# Altium PCB RX_fp.PcbDoc
Units mm, origin at the board's own origin, x right, y up, seen from the top; angles counter-clockwise.
Board outline 38.1 x 60.07 mm, 2 copper layers (Top Layer, Bottom Layer); 114 components, 87 nets, 353 pads, 113 vias.
Unrouted connection lines stored in the file: 43.
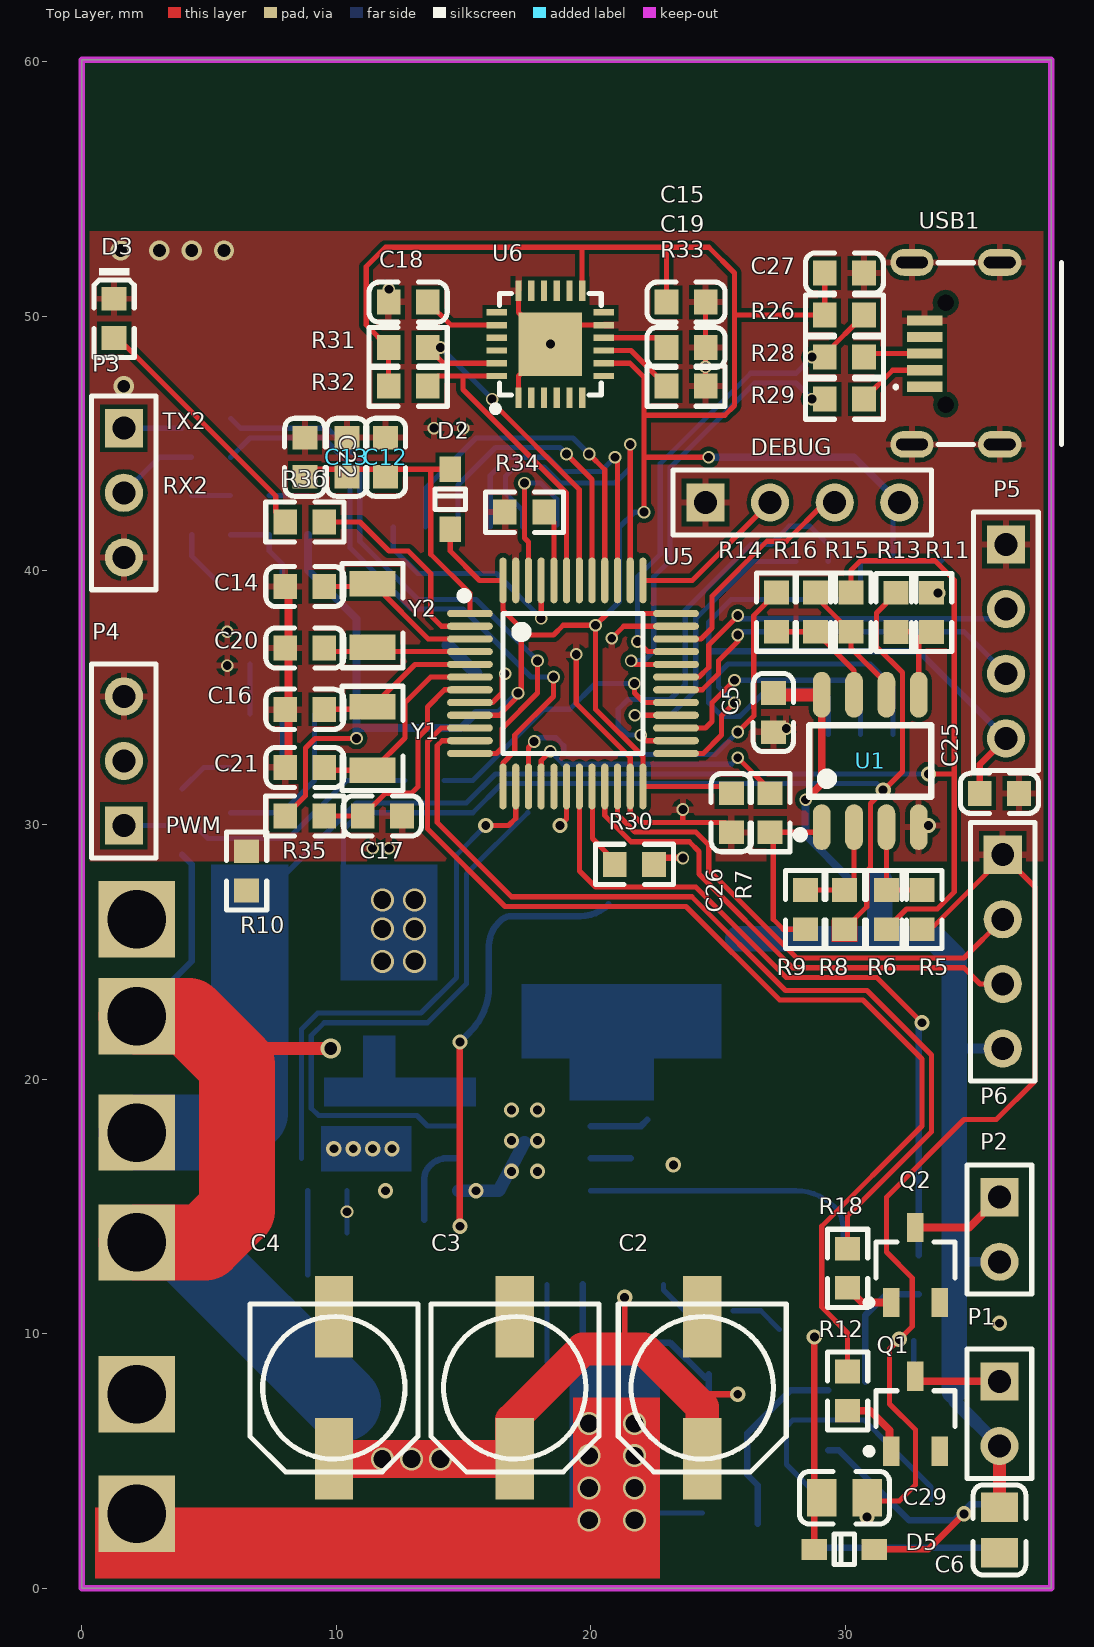
[diagram p0: Top Layer view]
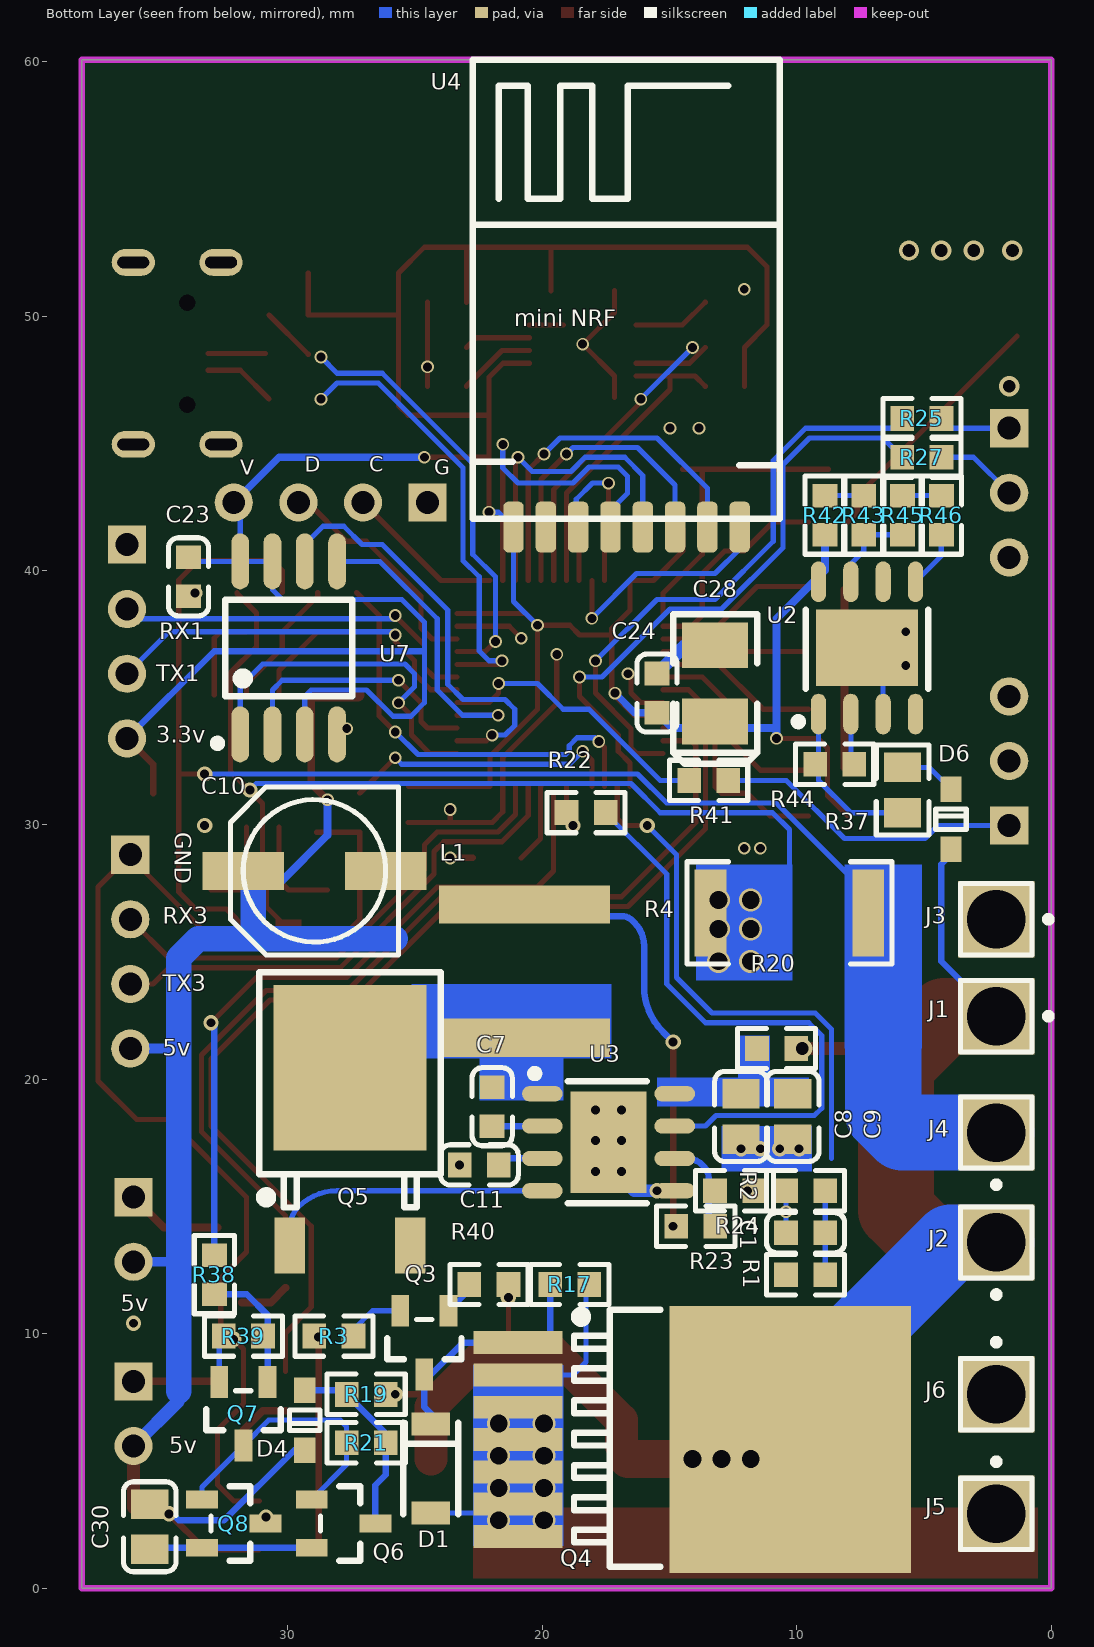
[diagram p1: Bottom Layer view, seen from below]
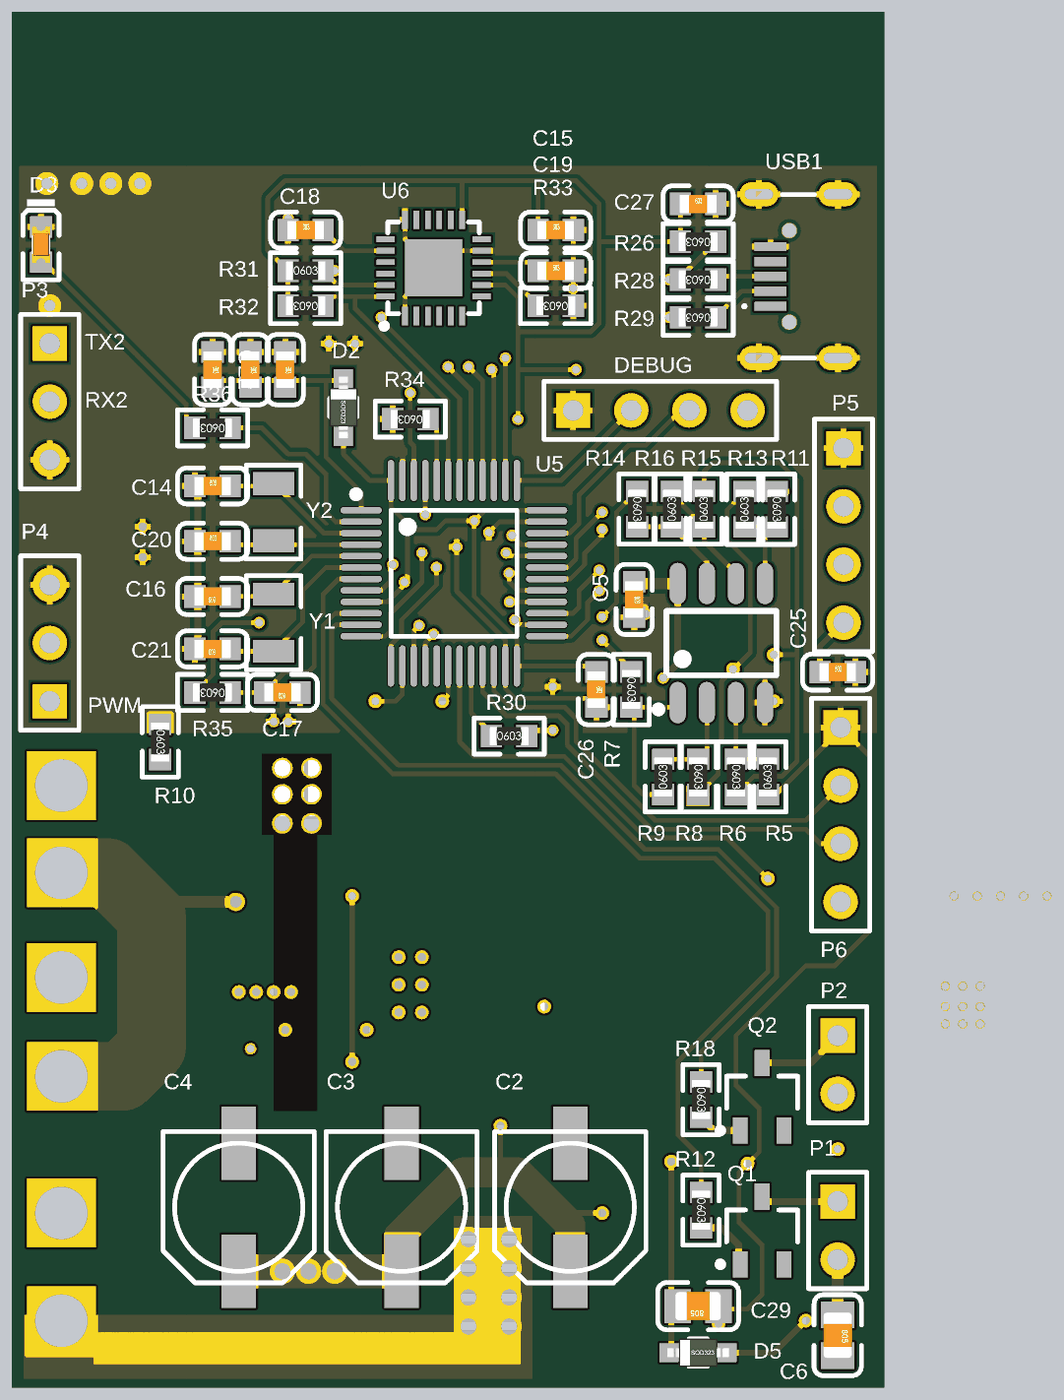
[diagram p2: 3D render of the assembled board from above, using the file's embedded part models]
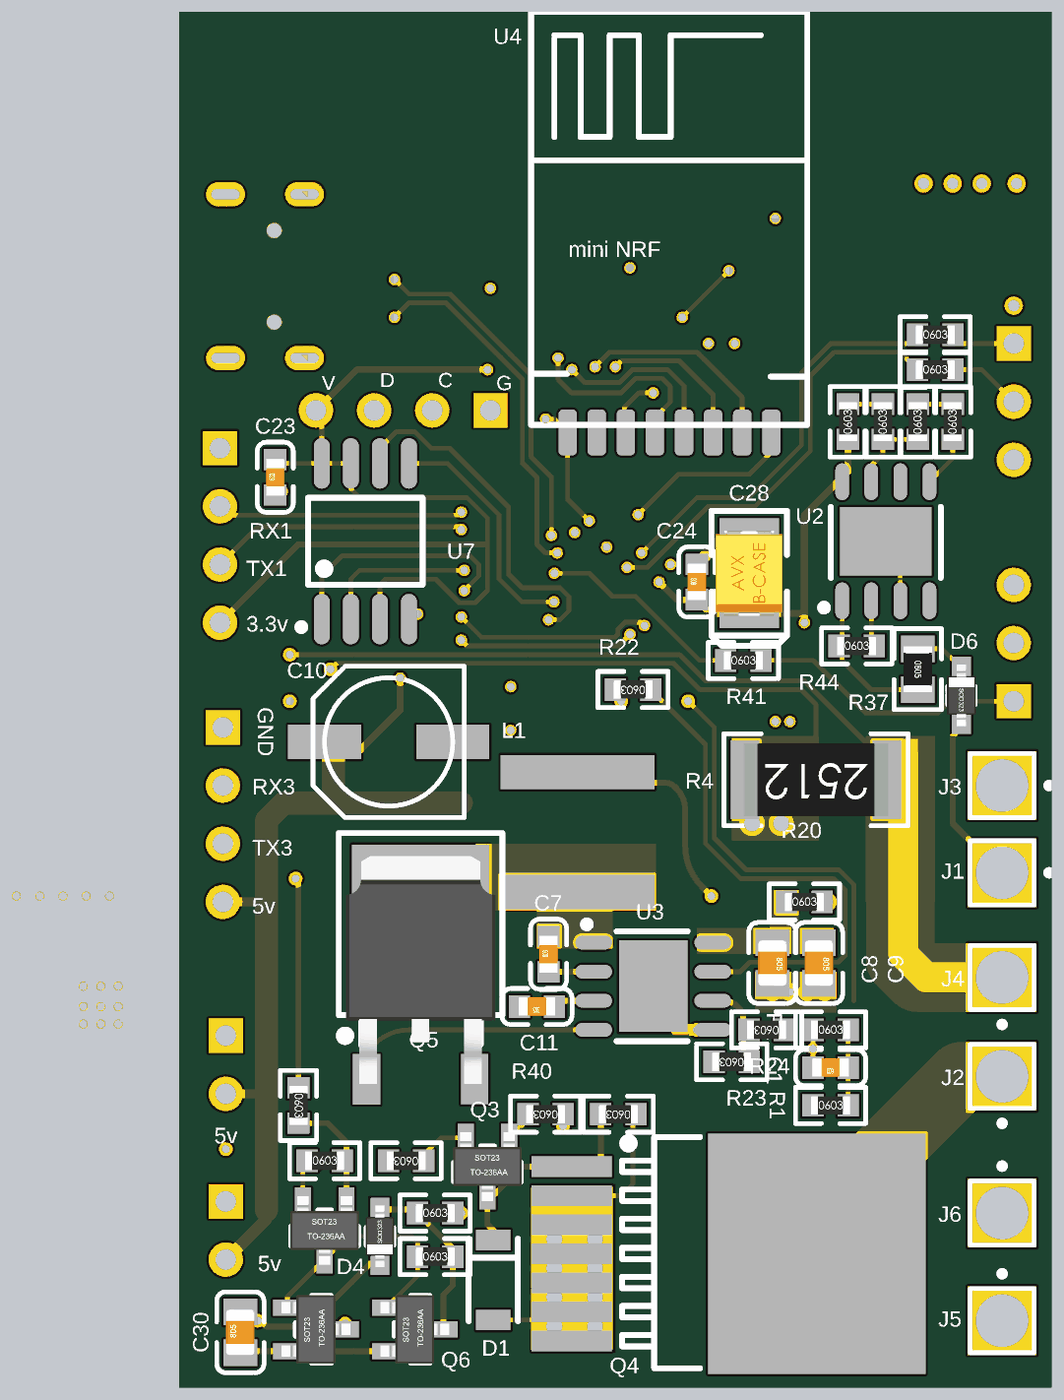
[diagram p3: 3D render of the assembled board from below, using the file's embedded part models]

## Layer stack, top to bottom
Top Layer: signal copper 0.0356
Dielectric: dielectric 0.32, FR-4, Dk 4.8
Bottom Layer: signal copper 0.0356

## Board outline
0,0 38.1,0 38.1,60.071 0,60.071

## Design rules (kind name [scope] priority, off if disabled: settings)
Clearance Clearance_1 [(InNamedPolygon('Top Layer-PGND'))] p1: gap=0.279
Clearance [All] p2: gap=0.178
HoleToHoleClearance [All] p1: gap=0.203 allowstackedmicrovias=TRUE
MinimumSolderMaskSliver [All] p1: minsoldermaskwidth=0.178
PolygonConnect [All] p1: connectstyle=Direct reliefconductorwidth=0.254 reliefentries=4 polygonreliefangle="90 Angle"
RoutingVias [All] p1: holewidth=0.711 width=1.27 viastyle="Through Hole" minholewidth=0.711 minwidth=1.27 maxholewidth=0.711 maxwidth=1.27
SilkToSilkClearance [All] p1: silktosilkclearance=0.203
SilkscreenOverComponentPads [All] p1: minsilkscreentomaskgap=0.102
SolderMaskExpansion [All] p1: expansion=0.102
Width [All] p1: maxlimit=5 minlimit=0.203 preferedwidth=0.254
24 further rules are at their usual default settings.

## Classes and differential pairs
component class U_POWER: C1 C2 C3 C4 C5 C6 C7 C8 C9 C10 C11 C29 C30 D1 D4 D5 J1 J2 J3 J4 J5 J6 L1 P1 P2 Q1 Q2 Q3 Q4 Q5 Q6 Q7 Q8 R1 R2 R3 R4 R5 R6 R7 R8 R9 R10 R11 R12 R13 R14 R15 R16 R17 R18 R19 R20 R21 R22 R23 R24 R38 R39 R40 U1 U3
component class U_RX: C12 C13 C14 C15 C16 C17 C18 C19 C20 C21 C22 C23 C24 C25 C26 C27 C28 D2 D3 D6 DEBUG P3 P4 P5 P6 R25 R26 R27 R28 R29 R30 R31 R32 R33 R34 R35 R36 R37 R41 R42 R43 R44 R45 R46 SWIM1 U2 U4 U5 U6 U7 USB1 Y1 Y2

## Components (designator, comment, footprint, x,y, rotation, side; value= is the part's Value field where it differs from the comment)
C1 "100nF (104) 10% 50V" 0603_C 9.652,13.97 r0 bottom
C2 "100uF" CC6.56.5 24.384,7.874 r90 top
C3 "100uF" CC6.56.5 17.018,7.874 r90 top
C4 "100uF" CC6.56.5 9.906,7.874 r90 top
C5 "100nF (104) 10% 50V" 0603_C 27.178,34.417 r270 top
C6 "10uF" 0805_C 36.068,2.286 r270 top
C7 "100nF" 0603_C 21.971,18.923 r90 bottom
C8 "10uF" 0805_C 12.192,18.542 r270 bottom
C9 "10uF" 0805_C 10.16,18.542 r270 bottom
C10 "100uF" CC6.56.5 28.956,28.194 r180 bottom
C11 "1uF" 0603_C 22.479,16.637 r0 bottom
C12 "10uF" 0603_C 11.938,44.45 r270 top
C13 "10uF" 0603_C 10.414,44.45 r270 top
C14 "15pF (150) 5% 50V" 0603_C 8.763,39.37 r0 top
C15 "100nF (104) 10% 50V" 0603_C 23.749,50.546 r0 top
C16 "15pF (150) 5% 50V" 0603_C 8.763,34.544 r180 top
C17 "1uF (105) 10% 50V" 0603_C 11.811,30.353 r180 top
C18 "10uF" 0603_C 12.827,50.546 r0 top
C19 "100nF" 0603_C 23.749,48.768 r0 top
C20 "15pF (150) 5% 50V" 0603_C 8.763,36.957 r0 top
C21 "15pF (150) 5% 50V" 0603_C 8.763,32.258 r180 top
C22 "10uF" 0603_C 8.763,44.45 r270 top
C23 "100nF (104) 10% 50V" 0603_C 33.909,39.751 r90 bottom
C24 "100nF" 0603_C 15.494,35.179 r90 bottom
C25 "100nF" 0603_C 36.068,31.242 r0 top
C26 "100nF" 0603_C 25.527,30.48 r270 top
C27 "100nF" 0603_C 29.972,51.689 r0 top
C28 "100uF" CASE-B_3528 13.208,35.56 r270 bottom
C29 "10uF" 0805_C 29.972,3.556 r180 top
C30 "10uF" 0805_C 35.433,2.413 r90 bottom
D1 "9V" LL-34 24.384,4.699 r270 bottom
D2 "1N4148WS T4" SOD-323 14.478,42.799 r270 top
D3 "白灯 0603" 0603_LED_S1 1.27,49.911 r270 top
D4 "1N4148WS T4" SOD-323 29.337,6.604 r90 bottom
D5 "1N4148WS T4" SOD-323 29.972,1.524 r0 top
D6 "1N4148WS T4" SOD-323 3.937,30.226 r270 bottom
DEBUG "Header 4" HDR1X4 24.511,42.672 r0 top
J1 "Socket" PIN1 2.159,22.479 r270 bottom
J2 "Socket" PIN1 2.159,13.589 r0 bottom
J3 "Socket" PIN1 2.159,26.289 r270 bottom
J4 "Socket" PIN1 2.159,17.907 r0 bottom
J5 "Socket" PIN1 2.159,2.921 r180 bottom
J6 "Socket" PIN1 2.159,7.62 r180 bottom
L1 "4.3uH ±10%" 2225 20.701,24.257 r270 bottom
P1 "LED1" HDR1X2 36.068,8.128 r270 top
P2 "LED2" HDR1X2 36.068,15.367 r270 top
P3 "Header 3" HDR1X3 1.651,45.593 r270 top
P4 "Header 3" HDR1X3 1.651,29.972 r90 top
P5 "Header 4" HDR1X4 36.322,41.021 r270 top
P6 "Header 4" HDR1X4 36.195,28.829 r270 top
Q1 "AO3400A" SOT-23-3L 32.766,6.858 r270 top
Q2 "AO3400A" SOT-23-3L 32.766,12.7 r270 top
Q3 "SS8550 Y2" SOT-23(SOT-23-3) 24.638,9.652 r90 bottom
Q4 "NMOS" TO-263-7 20.955,5.842 r0 bottom
Q5 "N道沟" TO-252-2 27.559,13.462 r270 bottom
Q6 "SS8050 Y1" SOT-23(SOT-23-3) 27.813,2.54 r0 bottom
Q7 "SS8050 Y1" SOT-23(SOT-23-3) 31.75,6.858 r90 bottom
Q8 "SS8550 Y2" SOT-23(SOT-23-3) 32.131,2.54 r0 bottom
R1 "110KΩ (1103) ±1%" 0603_R 9.652,12.319 r180 bottom
R2 "10KΩ (1002) ±1%" 0603_R 9.652,15.621 r180 bottom
R3 "680Ω (6800) ±1%" 0603_R 28.194,9.906 r0 bottom
R4 "0.001Ω" 2512_R 10.287,26.543 r0 bottom
R5 "100KΩ (3002) ±1%" 0603_R 33.02,26.67 r90 top
R6 "10KΩ (1002) ±1%" 0603_R 31.623,26.67 r270 top
R7 "10KΩ (1002) ±1%" 0603_R 27.051,30.48 r270 top
R8 "10KΩ (1002) ±1%" 0603_R 29.972,26.67 r270 top
R9 "100KΩ (3002) ±1%" 0603_R 28.448,26.67 r90 top
R10 "0Ω (0R0) ±1%" 0603_R 6.477,28.194 r270 top
R11 "100KΩ (3002) ±1%" 0603_R 33.401,38.354 r270 top
R12 "1KΩ" 0603_R 30.099,7.747 r270 top
R13 "10KΩ (1002) ±1%" 0603_R 32.004,38.354 r90 top
R14 "10KΩ (1002) ±1%" 0603_R 27.305,38.362 r270 top
R15 "10KΩ (1002) ±1%" 0603_R 30.226,38.362 r90 top
R16 "100KΩ (3002) ±1%" 0603_R 28.829,38.362 r90 top
R17 "10KΩ" 0603_R 18.923,11.938 r0 bottom
R18 "1KΩ" 0603_R 30.099,12.573 r270 top
R19 "680Ω (6800) ±1%" 0603_R 26.924,7.62 r180 bottom
R20 "0Ω (0R0) ±1%" 0603_R 10.795,21.209 r180 bottom
R21 "4.7KΩ (4701) ±1%" 0603_R 26.924,5.715 r180 bottom
R22 "1KΩ (1001) ±1%" 0603_R 18.28,30.48 r0 bottom
R23 "51KΩ" 0603_R 13.97,14.224 r0 bottom
R24 "10KΩ" 0603_R 12.446,15.621 r0 bottom
R25 "470Ω (4700) ±1%" 0603_R 5.08,45.974 r180 bottom
R26 "4.7KΩ (4701) ±1%" 0603_R 29.972,50.038 r180 top
R27 "470Ω (4700) ±1%" 0603_R 5.08,44.45 r180 bottom
R28 "22Ω (22R0) ±1%" 0603_R 29.972,48.387 r180 top
R29 "22Ω (22R0) ±1%" 0603_R 29.972,46.736 r180 top
R30 "10KΩ (1002) ±1%" 0603_R 21.717,28.448 r0 top
R31 "10KΩ" 0603_R 12.827,48.768 r0 top
R32 "10KΩ" 0603_R 12.827,47.244 r180 top
R33 "10KΩ" 0603_R 23.749,47.244 r180 top
R34 "10KΩ (1002) ±1%" 0603_R 17.399,42.291 r180 top
R35 "10KΩ (1002) ±1%" 0603_R 8.763,30.353 r180 top
R36 "470Ω (4700) ±1%" 0603_R 8.763,41.91 r180 top
R37 "0Ω" 0805_R 5.842,31.369 r270 bottom
R38 "1KΩ" 0603_R 32.893,12.319 r270 bottom
R39 "100KΩ" 0603_R 31.75,9.906 r180 bottom
R40 "10KΩ" 0603_R 22.098,11.938 r0 bottom
R41 "470Ω (4700) ±1%" 0603_R 13.462,31.75 r180 bottom
R42 "4.3KΩ" 0603_R 8.89,42.172 r90 bottom
R43 "160KΩ" 0603_R 7.366,42.172 r90 bottom
R44 "100KΩ" 0603_R 8.509,32.385 r180 bottom
R45 "100KΩ" 0603_R 5.842,42.172 r90 bottom
R46 "10KΩ" 0603_R 4.318,42.172 r90 bottom
U1 "LM358DR2G" SOIC-8_150mil 30.988,32.512 r0 top
U2 "MAX5024" SOIC-8_EP_150mil 7.239,36.957 r180 bottom
U3 "MP38892" SOIC-8_EP_150mil 17.399,17.526 r270 bottom
U4 "NRF24L01" miniNRF24L01 21.463,42.418 r180 bottom locked
U5 "STM32F103C8T6" LQFP-48_7x7x05P 19.304,35.56 r270 top locked
U6 "MPU6050" QFN24 18.415,48.895 r90 top
U7 "W25Q128FVSIG" SOIC-8_208mil 29.972,36.957 r180 bottom
USB1 "USB口" "MICRO USB" 32.639,44.958 r90 top
Y1 "8MHz ±20ppm 20pF" "SMD-3215_2P FC - 135" 11.43,33.401 r90 top
Y2 "32.768KHz ±20ppm 12.5pF" "SMD-3215_2P FC - 135" 11.43,38.227 r90 top

## Footprints (in the part's own frame and the unit in brackets; to place one, negate y for a bottom-side part, rotate by r counter-clockwise, add the part's x,y. Pads: shape width x height; smd on the part's side, far side on the other; paste and mask are expansions set on the pad)
0603_C [mm]
  rect 0.93x0.98 smd: 1(-0.77,0) 2(0.77,0)
  silkscreen extent -1.53,-0.79 1.54,0.79, body extent -0.8,-0.4 0.8,0.4, height 0.3
0603_LED_S1 [mm]
  rect 0.93x0.98 smd: A(0.77,0) K(-0.77,0)
  silkscreen extent -1.97,-0.79 1.54,0.79, body extent -0.8,-0.4 0.8,0.4, height 0.6
0603_R [mm]
  rect 0.93x0.98 smd: 1(-0.77,0) 2(0.77,0)
  silkscreen extent -1.53,-0.79 1.54,0.79, body extent -0.85,-0.4 0.85,0.4, height 0.56
0805_C [mm]
  rect 1.16x1.47 smd: 1(-0.89,0) 2(0.89,0)
  silkscreen extent -1.77,-1.04 1.77,1.04, body extent -1,-0.62 1,0.63, height 0.77
0805_R [mm]
  rect 1.16x1.47 smd: 1(-0.89,0) 2(0.89,0)
  silkscreen extent -1.77,-1.04 1.77,1.03, body extent -1,-0.63 1,0.63, height 0.49
2225 [mm]
  rect 1.5x6.72 smd: 1(-2.62,0) 2(2.62,0)
2512_R [mm]
  rect 1.25x3.42 smd: 1(-3.1,0) 2(3.1,0)
  silkscreen extent -4.03,-2.01 4.02,2.01, body extent -3.16,-1.6 3.16,1.6, height 0.62
CASE-B_3528 [mm]
  rect 1.8x2.6 smd: 1(1.5,0) 2(-1.5,0)
  silkscreen extent -2.73,-1.65 3.16,1.65, body extent -1.85,-1.47 1.85,1.46, height 2.03
CC6.56.5 [mm]
  rect 3.2x1.5 smd: 1(-2.794,0) 2(2.8,0)
  silkscreen extent -3.3,-3.3 3.3,3.3
HDR1X2 [mm] "Connector; Header; 2 Position"
  rect 1.5x1.5 hole 0.9: 1(0,0)
  round 1.5 hole 0.9: 2(2.54,0)
  silkscreen extent -1.27,-1.27 3.81,1.27
HDR1X3 [mm] "Connector; Header; 3 Position"
  rect 1.5x1.5 hole 0.9: 1(0,0)
  round 1.5 hole 0.9: 2(2.54,0) 3(5.08,0)
  silkscreen extent -1.27,-1.27 6.35,1.27
HDR1X4 [mm] "Connector; Header; 4 Position"
  rect 1.5x1.5 hole 0.9: 1(0,0)
  round 1.5 hole 0.9: 2(2.54,0) 3(5.08,0) 4(7.62,0)
  silkscreen extent -1.27,-1.27 8.89,1.27
LL-34 [mm]
  rect 0.9x1.5 smd: 1(1.75,0) 2(-1.75,0)
  silkscreen extent -1.8,-1.08 1.8,1.08
LQFP-48_7x7x05P [mm]
  oval 0.28x1.8 smd mask+0.051: 1(-2.75,-4.05) 2(-2.25,-4.05) 3(-1.75,-4.05) 4(-1.25,-4.05) 5(-0.75,-4.05) 6(-0.25,-4.05) 7(0.25,-4.05) 8(0.75,-4.05) 9(1.25,-4.05) 10(1.75,-4.05) 11(2.25,-4.05) 12(2.75,-4.05) 25(2.75,4.05) 26(2.25,4.05) 27(1.75,4.05) 28(1.25,4.05) 29(0.75,4.05) 30(0.25,4.05) 31(-0.25,4.05) 32(-0.75,4.05) 33(-1.25,4.05) 34(-1.75,4.05) 35(-2.25,4.05) 36(-2.75,4.05)
  oval 1.8x0.28 smd mask+0.051: 13(4.05,-2.75) 14(4.05,-2.25) 15(4.05,-1.75) 16(4.05,-1.25) 17(4.05,-0.75) 18(4.05,-0.25) 19(4.05,0.25) 20(4.05,0.75) 21(4.05,1.25) 22(4.05,1.75) 23(4.05,2.25) 24(4.05,2.75) 37(-4.05,2.75) 38(-4.05,2.25) 39(-4.05,1.75) 40(-4.05,1.25) 41(-4.05,0.75) 42(-4.05,0.25) 43(-4.05,-0.25) 44(-4.05,-0.75) 45(-4.05,-1.25) 46(-4.05,-1.75) 47(-4.05,-2.25) 48(-4.05,-2.75)
  silkscreen extent -3.6,-4.42 2.75,2.75
"MICRO USB" [mm]
  rect 0.4x1.4 smd: 1(2.265,-0.49) 2(2.915,-0.49) 3(3.565,-0.49) 4(4.215,-0.49) 5(4.865,-0.49)
  oval 1.05x1.7 hole 0.45 slot 1.25 at 90 deg: 6(7.15,0.01) 7(7.15,-3.44) 8(0,0.01) 9(0,-3.44)
  round 0.3 hole 0.65: MH1(1.565,-1.315) MH2(5.565,-1.315)
  silkscreen extent 0,-5.87 7.14,0.65
miniNRF24L01 [mm]
  rrect50% 0.8x2 smd: 1(0.33,-0.711) 2(1.6,-0.711) 3(2.87,-0.711) 4(4.14,-0.711) 5(5.41,-0.711) 6(6.68,-0.711) 7(7.95,-0.711) 8(9.22,-0.711)
  silkscreen extent -1.27,-0.38 10.8,17.65
PIN1 [mm] "Generic Antenna; 1 Lead"
  rect 3x3 hole 2.3: 1(0,0)
  silkscreen extent -1.4,-1.4 1.4,2.17
QFN24 [mm]
  rect 0.8x0.25 smd: 1(-2.101,1.25) 2(-2.101,0.75) 3(-2.101,0.25) 4(-2.101,-0.25) 5(-2.101,-0.75) 6(-2.101,-1.25) 13(2.101,-1.25) 14(2.101,-0.75) 15(2.101,-0.25) 16(2.101,0.25) 17(2.101,0.75) 18(2.101,1.25)
  rect 0.25x0.8 smd: 7(-1.25,-2.101) 8(-0.75,-2.101) 9(-0.25,-2.101) 10(0.25,-2.101) 11(0.75,-2.101) 12(1.25,-2.101) 19(1.25,2.101) 20(0.75,2.101) 21(0.25,2.101) 22(-0.25,2.101) 23(-0.75,2.101) 24(-1.25,2.101)
  rect 2.5x2.5 smd: 25(0,0)
  silkscreen extent -2.66,-2 2,2.28
"SMD-3215_2P FC - 135" [mm]
  rect 1x1.8 smd: 1(-1.25,0) 2(1.25,0)
  silkscreen extent -2.05,-1.2 2.05,1.2
SOD-323 [mm]
  rect 1x0.83 smd: 1(1.18,0) 2(-1.18,0)
  silkscreen extent -0.4,-0.6 0.4,0.6, body extent -1.35,-0.62 1.35,0.63, height 1.1
SOIC-8_150mil [mm]
  oval 0.7x1.8 smd: 1(-1.905,-2.6) 2(-0.635,-2.6) 3(0.635,-2.6) 4(1.905,-2.6) 5(1.905,2.6) 6(0.635,2.6) 7(-0.635,2.6) 8(-1.905,2.6)
  silkscreen extent -2.9,-3.05 2.4,1.4
SOIC-8_208mil [mm]
  oval 0.7x2.2 smd: 1(-1.905,-3.4) 2(-0.635,-3.4) 3(0.635,-3.4) 4(1.905,-3.4) 5(1.905,3.4) 6(0.635,3.4) 7(-0.635,3.4) 8(-1.905,3.4)
  silkscreen extent -2.95,-3.9 2.5,1.9
SOIC-8_EP_150mil [mm]
  rect 4x3 smd: 0(0,0)
  oval 0.6x1.6 smd: 1(-1.905,-2.6) 2(-0.635,-2.6) 3(0.635,-2.6) 4(1.905,-2.6) 5(1.905,2.6) 6(0.635,2.6) 7(-0.635,2.6) 8(-1.905,2.6)
  silkscreen extent -2.85,-3.05 2.4,1.5
SOT-23(SOT-23-3) [mm]
  rect 1.25x0.7 smd: 1(1.25,-0.95) 2(1.25,0.95) 3(-1.25,0)
  silkscreen extent -0.65,-1.46 0.9,1.46, body extent -1.5,-1.5 1.5,1.5, height 1.3
SOT-23-3L [mm] "http://www.aosmd.com/res/packa"
  rect 1.15x0.65 smd: 1(1.475,-0.95) 2(1.475,0.95) 3(-1.475,0)
  silkscreen extent -0.9,-1.95 1.6,1.55, body extent -0.9,-1.55 0.9,1.55, height 1.25
TO-252-2 [mm]
  rect 2.2x1.2 smd: 1(0,-2.361) 3(-0.004,2.361)
  rect 6.5x6 smd: 2(-7,0)
  silkscreen extent -10.75,-3.57 -1.5,3.57, body extent -9.74,-3.27 0.2,3.27, height 2.44
TO-263-7 [mm]
  rect 9.5x10.5 smd: 0(-10.7,0)
  rect 3.5x0.9 smd: 1(0,-3.81) 2(0,-2.54) 3(0,-1.27) 4(0,0) 5(0,1.27) 6(0,2.54) 7(0,3.81)
  silkscreen extent -5.6,-5.1 -2.2,5

## Part data
C1 C5 C7 C15 C19 C23 C24 C25 C26 C27: library part "0603 100nF (104) 10% 50V", "贴片"
C2 C3 C4 C10 C28: library part "3528 100uF (107) 10% 6.3V", "îãµ"
C6 C8 C9 C29 C30: library part "0805 10uF (106) 10% 25V", "贴片"
C11 C17: library part "0603 1uF (105) 10% 50V", "贴片"
C12 C13 C18 C22: library part "0603 10uF (106) 10% 10V", "贴片"
C14 C16 C20 C21: library part "0603 15pF (150) 5% 50V", "贴片"
D1: library part "LL-34 ZMM5V6", "稳压"
D2 D4 D5 D6: library part "SOD-323 1N4148WS T4", "¶þ¼"
D3: library part "0603 白灯", "·"
DEBUG P5 P6: "Header, 4-Pin"
L1: library part "0805 10uH 10%", "贴片"
P1 P2: library part "Header 2", "Header, 2-Pin"
P3 P4: "Header, 3-Pin"
Q1 Q2: library part "AO3400A N道沟 X0YV1T SOT-23", "MOS(场效应管)"
Q3 Q8: library part "SOT-23 SS8550 Y2", "Èý¼"
Q4: library part "Header 8", "Header, 8-Pin"
Q5: library part "AO3400A N道沟 X0YV1T SOT-23", "MOS(³"
Q6 Q7: library part "SOT-23 SS8050 Y1", "Èý¼"
R1: library part "0603 110KΩ (1103) 1%", "贴"
R2 R6 R7 R8 R13 R14 R15 R17 R24 R30 R31 R32 R33 R34 R35 R40 R46: library part "0603 10KΩ (1002) 1%", "贴"
R3 R19: library part "0603 680Ω (6800) 1%", "贴"
R4 R10 R20: library part "0603 0Ω (0R0) 1%", "贴"
R5 R9 R11 R16 R39: library part "0603 30KΩ (3002) 1%", "贴"
R12 R18 R22 R38: library part "0603 1KΩ (1001) 1%", "贴"
R21 R26: library part "0603 4.7KΩ (4701) 1%", "贴"
R23: library part "0603 51KΩ (5102) 1%", "贴"
R25 R27 R36 R41: library part "0603 470Ω (4700) 1%", "贴"
R28 R29: library part "0603 22Ω (22R0) 1%", "贴"
R37: library part "0805 0Ω (0R0) 1%", "贴"
R42: library part "0603 4.3KΩ (4301) 1%", "贴"
R43: library part "0603 160KΩ (1603) 1%", "贴"
R44 R45: library part "0603 100KΩ (1003) 1%", "贴"
U1: "通用"
U2: "LDO 65Vmax"
U5: "ARM"
U6: "9轴运动"
U7: "Flash ROM"
Y1: library part "SMD-5032_2P 8MHz 20ppm 20pF", "贴片"
Y2: library part "SMD-3215_2P 32.768KHz 20ppm 12.5pF", "贴片"

## Via types
v1: diameter 0.5, hole 0.35, Top Layer to Bottom Layer, 47 vias
v2: diameter 0.6, hole 0.35, Top Layer to Bottom Layer, 43 vias
v3: diameter 0.9, hole 0.7, Top Layer to Bottom Layer, 17 vias
v4: diameter 0.8, hole 0.5, Top Layer to Bottom Layer, 6 vias

## Nets (pads, with @x,y where several pads share a name; then routed paths per layer and width w, separated by ;. In a path a pad name is that pad's centre, name@x,y a point inside that pad or via, vN(x,y) a via of type N, cw(c..) or ccw(c..) an arc to the next point about the centre after c; other vN are vias at no path point)
CLK: DEBUG.2 U5.37 | length 6.3
  Top Layer w0.203: U5.37 23.989,39.61 DEBUG.2
CUR_CHARGE: R7.1 U5.16 | length 11.2
  Top Layer w0.203: U5.16 18.054,32.532 v1(18.415,32.893) ; v1(25.781,32.639) 27.17,31.25 R7.1@27.178,31.25
  Bottom Layer w0.203: v1(18.415,32.893) 18.923,32.385 25.527,32.385 v1(25.781,32.639)
CUR_DISCHARGE: R14.1 U5.15 | length 16.8
  Top Layer w0.203: U5.15 17.554,33.048 v1(17.78,33.274) ; v1(25.781,33.655) 26.416,34.29 26.416,34.599 26.409,34.606 26.409,38.236 R14.1
  Bottom Layer w0.203: v1(17.78,33.274) 17.928,33.422 18.634,33.422 18.944,33.112 18.944,32.902 19.081,32.766 24.892,32.766 v1(25.781,33.655)
GND: C5.2 C12.1 C13.1 C14.1 C15.2 C16.2 C17.1 C18.1 C19.2 C20.1 C21.2 C22.1 C23.1 C24.2 C25.2 C26.2 C27.2 C28.2 C29.1 D3.K DEBUG.1 P3.3 P4.3 P5.1 P6.1 Q7.2 Q8.3 R5.1 R10.1 R11.1 R30.2 R33.1 R34.2 R39.1 R45.2 R46.2 U1.4 U2.0 U2.3 U4.2 U5.8 U5.23 U5.35 U5.47 U6.1 U6.11 U6.18 U6.25 U7.4 USB1.5 USB1.6 USB1.7 USB1.8 USB1.9 | length 77.8
  Top Layer w0.203: U5.8 16.141,34.81 16.51,35.179 16.51,35.814 v1(16.637,35.941) ; U6.1 17.165,47.645 v1(18.415,48.895) 17.165,50.145 U6.18 ; U6.25@19.165,49.645 U6.11 ; v1(19.431,36.703) 19.431,34.767 21.554,32.644 U5.23 21.554,30.516 21.971,30.099 23.622,30.099 ; v1(20.828,37.338) 21.3,37.81 U5.35 ; v1(23.622,30.607) 23.622,30.099 ; R33.1 C19.2 C15.2 ; C26.2@25.273,30.099 23.622,30.099 ; C29.1@31.115,3.429 32.131,3.429 32.766,4.064 32.766,6.223 31.75,7.239 31.75,9.398 v2(32.131,9.779) 32.639,10.287 32.639,12.192 31.623,13.208 31.623,15.367 34.671,18.415 35.941,18.415 37.465,19.939 37.465,27.559 P6.1 ; R5.1 33.369,25.9 36.195,28.726 P6.1 ; P6.1@36.838,29.472 P6.1
  Top Layer w0.254: R30.2@22.741,28.702 v1(23.622,28.702)
  Top Layer w0.305: C21.2@8.12,32.258 C14.1@8.12,39.243
  Bottom Layer w0.203: R46.2 R45.2 ; U2.3 U2.0@6.604,36.322 ; Q7.2 R39.1@32.7,9.726
  Bottom Layer w0.508: C28.2@14.383,37.06 C24.2
  other v1: 11.43,29.083 12.065,29.083 27.686,33.782 5.715,36.258 5.715,37.592 13.843,45.593 14.986,45.593 24.511,48.006 12.065,51.054
  other v2: 30.861,2.794 33.274,29.972 33.655,39.116
  other v4: 1.651,47.244 1.524,52.578 3.048,52.578 4.318,52.578 5.588,52.578
LED: R36.1 U5.2 | length 8.4
  Top Layer w0.203: R36.1 10.93,41.91 12.073,40.767 12.827,40.767 13.716,39.878 13.716,38.227 14.133,37.81 U5.2
LED1: R12.1 U5.10 | length 42.8
  Top Layer w0.203: U5.10 14.125,33.81 13.589,33.274 13.589,29.845 16.637,26.797 23.749,26.797 27.432,23.114 30.703,23.114 33.02,20.797 33.02,18.161 29.083,14.224 29.083,11.049 30.099,10.033 R12.1
LED2: R18.1 U5.11 | length 36.6
  Top Layer w0.203: U5.11 14.164,33.31 13.97,33.116 13.97,30.099 16.891,27.178 23.972,27.178 27.655,23.495 30.861,23.495 33.401,20.955 33.401,17.938 30.099,14.636 R18.1
MOS_G: R38.1 U5.19 | length 28.2
  Top Layer w0.203: U5.19@19.558,31.242 19.558,28.194 20.193,27.559 24.13,27.559 27.686,24.003 31.242,24.003 v2(33.02,22.225)
  Bottom Layer w0.254: R38.1 32.893,22.098 v2(33.02,22.225)
MPU_SCL: R31.2 U5.42 U6.23 | length 14.4
  Top Layer w0.203: R31.2 14.22,48.145 U6.23 ; v1(16.129,46.736) 16.129,46.609 19.554,43.184 U5.42
  Bottom Layer w0.203: v1(14.097,48.768) v1(16.129,46.736)
MPU_SDA: R32.1 U5.43 U6.24 | length 12.6
  Top Layer w0.203: R32.1 13.998,47.645 14.986,47.645 ; U6.24 14.986,47.645 ; U5.43 19.054,43.049 14.986,47.117 14.986,47.645
NetC1_1: C1.1 R1.2 R2.2 U5.14 | length 24.3
  Top Layer w0.203: v2(15.875,29.972) 16.764,29.972 17.054,30.262 U5.14
  Bottom Layer w0.203: 8.636,16.891 8.636,21.971 9.271,22.606 13.335,22.606 14.732,24.003 14.732,28.829 v2(15.875,29.972) ; R1.2 R2.2
NetC7_1: C7.1 U3.2 | length 2.3
  Bottom Layer w0.254: U3.2 21.979,18.161 C7.1@22.225,18.407
NetC7_2: C7.2 L1.2 Q5.2 U3.1 | length 2.4
  Bottom Layer w0.254: U3.1 21.709,19.431 C7.2@22.225,19.947
NetC8_1: C8.1 C9.1 R20.1 U3.8
NetC11_1: C11.1 U3.3 | length 1.6
  Bottom Layer w0.254: U3.3 C11.1@21.582,16.891
NetC12_2: C12.2 C13.2 C22.2 D2.2 U5.1 | length 12
  Top Layer w0.203: C22.2@8.763,43.979 D2.2 ; 13.716,43.942 13.716,40.64 15.254,39.102 U5.1
NetC14_2: C14.2 U5.3 Y2.2 | length 6.6
  Top Layer w0.203: C14.2 11.557,39.37 13.617,37.31 U5.3
NetC16_1: C16.1 U5.5 Y1.2 | length 6.5
  Top Layer w0.203: C16.1 11.323,34.544 Y1.2 13.089,36.31 U5.5
NetC17_2: C17.2 R35.1 U5.7 | length 9.4
  Top Layer w0.203: R35.1 C17.2 11.93,31.242 12.954,31.242 13.208,31.496 13.208,33.432 13.589,33.813 13.589,34.64 14.259,35.31 U5.7
NetC18_2: C18.2 U6.20 | length 3.1
  Top Layer w0.203: C18.2 14.498,49.645 U6.20
NetC19_1: C19.1 U6.10 | length 2.6
  Top Layer w0.203: U6.10 22.602,49.145 C19.1
NetC20_2: C20.2 U5.4 Y2.1 | length 5.5
  Top Layer w0.203: C20.2@9.779,36.81 U5.4
NetC21_1: C21.1 U5.6 Y1.1 | length 8.1
  Top Layer w0.203: C21.1 9.64,32.151 Y1.1 12.7,33.421 12.7,34.798 13.712,35.81 U5.6
NetC29_2: C29.2 D5.2 R3.2 | length 8.3
  Top Layer w0.254: D5.2 v2(28.792,9.869)
NetC30_1: C30.1 Q6.2 Q8.2 | length 6.3
  Bottom Layer w0.254: Q6.2 Q8.2 C30.1@35.366,1.59
NetC30_2: C30.2 D4.2 D5.1 | length 11.6
  Top Layer w0.254: D5.1 33.274,1.524 v2(34.671,2.921)
  Bottom Layer w0.254: D4.2 29.755,5.424 32.512,2.667 34.29,2.667 34.926,3.303 C30.2
NetD1_2: D1.2 Q3.3 Q4.1 R17.2 | length 8.3
  Bottom Layer w0.254: Q4.1@19.693,9.779 R17.2 ; Q4.1 23.114,9.652 Q3.3@24.501,8.265 ; D1.2@24.13,6.612 24.638,7.12 Q3.3
NetD3_A: D3.A R36.2 | length 10.1
  Top Layer w0.203: D3.A@1.338,49.208 7.62,42.926 7.62,42.283 R36.2
NetD4_1: D4.1 Q6.3 R19.1 R21.2 | length 7.6
  Bottom Layer w0.254: Q6.3 26.563,4.044 26.154,4.453 R21.2 26.154,6.08 R19.1 27.858,7.784 D4.1
NetD6_2: D6.2 R37.1 | length 2.3
  Bottom Layer w0.203: D6.2 4.79,32.259 R37.1
NetJ4_1: J4.1 R4.1 R6.2 R15.2 | length 58.3
  Top Layer w0.203: R15.2 30.226,40.005 30.607,40.386 33.528,40.386 34.29,39.624 34.29,32.004 ; R6.2 32.419,26.696 33.626,26.696 34.29,27.36 34.29,32.004 ; v2(33.274,32.004) 34.29,32.004
  Bottom Layer w0.203: R4.1@7.187,26.797 8.001,27.611 8.001,28.067 10.795,30.861 15.113,30.861 16.256,32.004 v2(33.274,32.004)
  Bottom Layer w3: J4.1 5.842,17.907 6.604,18.669 6.604,21.717
NetP1_1: P1.1 Q1.3 | length 3.2
  Top Layer w0.305: Q1.3@32.893,8.128 P1.1
NetP2_1: P2.1 Q2.3 | length 3.8
  Top Layer w0.305: Q2.3 34.876,14.175 P2.1
NetP3_1: P3.1 R25.2 | length 2.3
  Bottom Layer w0.203: P3.1 R25.2@3.929,45.593
NetP3_2: P3.2 R27.2 | length 3.2
  Bottom Layer w0.203: P3.2 3.048,44.45 R27.2
NetP4_1: P4.1 R41.2 | length 12.2
  Bottom Layer w0.203: P4.1 4.445,29.972 4.953,29.464 8.128,29.464 10.414,31.75 R41.2
NetQ1_1: Q1.1 R12.2 | length 2.6
  Top Layer w0.305: R12.2 30.984,6.977 31.75,6.211 Q1.1@31.75,5.588
NetQ2_1: Q2.1 R18.2 | length 2
  Top Layer w0.305: R18.2 30.677,11.225 Q2.1
NetQ3_1: Q3.1 R40.2 | length 1.4
  Bottom Layer w0.203: R40.2 22.868,11.722 Q3.1
NetQ3_2: Q3.2 R3.1 | length 2.1
  Bottom Layer w0.203: Q3.2 26.682,10.902 R3.1@27.424,10.16
NetQ5_1: Q5.1 U3.4 | length 11.4
  Bottom Layer w0.203: U3.4@20.006,15.614 U3.4 28.058,15.621 cw(c28.058,13.453) 29.591,14.986 cw(c28.796,14.191) 29.92,14.191 Q5.1
NetQ6_1: Q6.1 Q7.3 Q8.1 R21.1 | length 10.8
  Bottom Layer w0.203: Q6.1 27.694,4.859 R21.1 27.694,6.358 27.94,6.604 30.754,6.604 Q7.3 33.381,3.977 Q8.1
NetQ7_1: Q7.1 R38.2 R39.2 | length 5.1
  Bottom Layer w0.254: Q7.1 30.8,10.734 31.615,11.549 R38.2
NetR5_2: R5.2 R6.1 U1.3 | length 3.9
  Top Layer w0.203: U1.3 R6.1 R5.2
NetR7_2: R7.2 R9.1 U1.1 | length 6.6
  Top Layer w0.203: R9.1 27.567,25.9 27.178,26.289 27.178,29.71 U1.1@28.881,29.71
NetR8_1: R8.1 R9.2 U1.2 | length 4.1
  Top Layer w0.203: R9.2 R8.1 R8.1@30.226,27.694 ; R8.1@30.353,27.694 U1.2
NetR11_2: R11.2 R13.1 U1.5 | length 3.6
  Top Layer w0.203: R13.1@31.623,37.592 32.639,37.592 32.893,37.338 U1.5
NetR14_2: R14.2 R16.1 U1.7 | length 4.6
  Top Layer w0.203: R14.2 R16.1 30.353,36.068 U1.7
NetR15_1: R15.1 R16.2 U1.6 | length 5.2
  Top Layer w0.203: R16.2 28.829,38.989 R15.1 30.226,36.957 31.623,35.56 U1.6
NetR22_1: R22.1 U3.7 | length 23.6
  Bottom Layer w0.203: U3.7 13.589,18.161 13.177,18.573 9.309,18.573 9.017,18.865 9.017,21.717 9.525,22.225 13.589,22.225 15.113,23.749 15.113,28.067 R22.1@17.526,30.48
NetR23_1: R23.1 R24.2 U3.6 | length 3.5
  Bottom Layer w0.254: R23.1@13.462,14.486 13.462,16.129 cw(c14.075,16.129) 13.642,16.563 13.716,16.637 cw(c14.329,16.024) U3.6@14.329,16.891 ; U3.6@14.224,16.891 U3.6@14.329,16.891 ; U3.6 U3.6@14.329,16.891
NetR28_1: R28.1 USB1.3 | length 2.3
  Top Layer w0.203: R28.1@30.878,48.523 USB1.3
NetR29_1: R29.1 USB1.2 | length 2.9
  Top Layer w0.203: R29.1 30.742,46.744 31.871,47.873 USB1.2
NetR30_1: R30.1 U5.20 | length 3.1
  Top Layer w0.203: U5.20 20.066,31.498 20.066,29.464 R30.1@20.828,28.702
NetR33_2: R33.2 U6.9 | length 3
  Top Layer w0.203: U6.9 21.588,48.645 22.979,47.254 R33.2
NetR34_1: R34.1 U5.44 | length 2.3
  Top Layer w0.203: U5.44 R34.1@18.554,41.906
NetR37_2: R37.2 R44.1 U2.1 | length 6.4
  Bottom Layer w0.203: R37.2 7.873,30.479 9.144,31.75 U2.1
NetR42_2: R42.2 R43.2 | length 1.5
  Bottom Layer w0.203: R43.2 R42.2
NetR43_1: R43.1 R45.1 U2.7 | length 3.6
  Bottom Layer w0.203: R45.1 R43.1 7.366,40.767 7.874,40.259 U2.7
NetR44_2: R44.2 U2.2 | length 1.8
  Bottom Layer w0.203: R44.2@7.874,32.52 U2.2
NetR46_1: R46.1 U2.5 | length 2.3
  Bottom Layer w0.203: R46.1 4.318,40.573 U2.5
NRF_CE: U4.3 U5.46 | length 6.4
  Top Layer w0.203: v1(17.399,43.434) 17.399,41.275 17.554,41.12 U5.46
  Bottom Layer w0.203: v1(17.399,43.434) 18.034,43.434 18.669,42.799 U4.3@18.669,41.783
NRF_CS: U4.4 U5.38 | length 14.1
  Top Layer w0.203: U5.38 v1(21.554,44.958)
  Bottom Layer w0.203: U4.4 17.323,42.367 16.652,43.038 16.652,43.703 17.018,44.069 18.161,44.069 18.796,43.434 20.955,43.434 21.554,44.033 v1(21.554,44.958)
NRF_IRQ: U4.8 U5.45 | length 9.3
  Top Layer w0.203: v1(18.054,38.12) U5.45
  Bottom Layer w0.203: U4.8 12.243,40.843 13.208,39.878 16.296,39.878 v1(18.054,38.12)
NRF_MISO: U4.7 U5.40 | length 14.3
  Top Layer w0.203: v1(19.939,44.577) 20.554,43.962 U5.40
  Bottom Layer w0.203: U4.7 13.513,43.231 15.494,45.212 19.304,45.212 v1(19.939,44.577)
NRF_MOSI: U4.6 U5.41 | length 12
  Top Layer w0.203: v1(19.05,44.577) 20.054,43.573 U5.41
  Bottom Layer w0.203: U4.6 14.783,43.358 16.256,44.831 18.796,44.831 v1(19.05,44.577)
NRF_SCK: U4.5 U5.39 | length 12.5
  Top Layer w0.203: U5.39 v1@21.054,44.45
  Bottom Layer w0.203: U4.5 16.053,43.739 16.764,44.45 18.319,44.45 18.875,43.894 20.399,43.894 v1(20.955,44.45)
PA11: R29.2 U5.32 | length 17.6
  Top Layer w0.203: v1(21.59,36.449) 21.729,36.31 U5.32
  Bottom Layer w0.203: v1(21.59,36.449) 22.098,36.449 22.479,36.83 22.479,39.751 23.114,40.386 23.114,44.038 26.447,47.371 28.067,47.371 v1(28.702,46.736)
PA12: R26.1 R28.2 U5.33 | length 18.9
  Top Layer w0.203: v1(21.844,37.211) 22.245,36.81 U5.33 ; R28.2@29.202,48.498 R26.1
  Bottom Layer w0.203: v1(21.844,37.211) 21.844,39.751 22.733,40.64 22.733,44.196 26.289,47.752 28.067,47.752 v1(28.702,48.387)
PGND: C1.2 C2.2 C3.2 C4.2 C6.2 C8.2 C9.2 C10.2 C11.2 J3.1 J6.1 Q1.2 Q2.2 Q5.3 R2.1 R4.2 R8.2 R10.2 R13.2 R24.1 U3.0 U3.5 | length 46
  Top Layer w0.203: R8.2 30.854,26.782 30.854,28.184 30.994,28.324 30.994,30.844 32.252,32.103 32.252,35.985 31.235,37.003 31.235,38.328 32.004,39.098 R13.2
  Bottom Layer w0.203: C1.2 R2.1 ; v3(11.811,27.051) 10.668,28.194 10.287,28.194 10.287,29.814 10.953,30.48 15.367,30.48 16.51,31.623 31.242,31.623 v2(31.496,31.369)
  Bottom Layer w0.508: U3.5 16.383,15.621 U3.0
  other v1: 10.422,14.796
  other v2: 36.068,10.414 11.938,15.621 15.494,15.621 40.767,15.875 41.529,15.875 42.291,15.875 16.891,16.383 17.907,16.383 23.249,16.637 40.767,16.637 41.529,16.637 42.291,16.637 9.906,17.272 10.668,17.272 11.43,17.272 12.192,17.272 40.767,17.526 41.529,17.526 42.291,17.526 16.891,17.59 17.907,17.59 16.891,18.796 17.907,18.796 41.148,21.463 42.164,21.463 43.18,21.463 44.196,21.463 45.212,21.463
  other v3: 11.811,24.638 13.081,24.638 11.811,25.908 13.081,25.908 13.081,27.051
POWER_EN: R22.2 U5.18 | length 1.6
  Top Layer w0.203: v2(18.796,29.972) 19.054,30.23 U5.18
PWM_BLDC: R41.1 U5.29 | length 11.2
  Top Layer w0.203: v1(21.717,35.56) 21.717,35.179 22.086,34.81 U5.29
  Bottom Layer w0.203: R41.1 15.367,31.75 18.161,34.544 19.177,34.544 20.193,35.56 v1(21.717,35.56)
SPI2_CS: U5.25 U7.1 | length 14.2
  Top Layer w0.203: U5.25 24.428,32.81 25.146,33.528 25.146,34.29 v1(25.654,34.798)
  Bottom Layer w0.203: v1(25.654,34.798) 25.019,35.433 25.019,35.941 25.4,36.322 30.988,36.322 31.877,35.433 U7.1
SPI2_MISO: U5.27 U7.2 | length 10.4
  Top Layer w0.203: U5.27 24.508,33.81 24.765,34.067 24.765,34.798 v1(25.654,35.687)
  Bottom Layer w0.203: v1(25.654,35.687) 30.226,35.687 30.607,35.306 U7.2
SPI2_MOSI: U5.28 U7.5 | length 12.1
  Top Layer w0.203: v1(21.737,34.31) U5.28
  Bottom Layer w0.203: v1(21.737,34.31) 23.134,34.31 24.13,35.306 24.13,38.1 26.387,40.357 U7.5
SPI2_SCK: U5.26 U7.6 | length 17.1
  Top Layer w0.203: v1(21.971,33.528) 22.189,33.31 U5.26
  Bottom Layer w0.203: v1(21.971,33.528) 21.463,33.528 21.082,33.909 21.082,34.544 21.463,34.925 23.114,34.925 23.718,35.529 23.718,38.45 26.289,41.021 27.091,41.021 27.806,41.736 28.622,41.736 29.337,41.021 U7.6
SWD: DEBUG.3 U5.34 | length 9.2
  Top Layer w0.203: U5.34 24.338,37.31 24.765,37.736 24.765,38.989 26.924,41.148 27.686,41.148 29.21,42.672 DEBUG.3
UART1_RX: P5.2 U5.31 | length 14.3
  Top Layer w0.203: U5.31 24.253,35.81 24.638,36.195 24.638,37.071 25.781,38.214 v1(25.781,38.227) ; v1@25.654,38.214 v1@25.654,38.227
  Bottom Layer w0.203: v1@25.654,38.227 25.781,38.1 P5.2@35.941,38.1
UART1_TX: P5.3 U5.30 | length 15.2
  Top Layer w0.203: U5.30 24.388,35.31 25.019,35.941 25.019,36.449 25.781,37.211 v1(25.781,37.465)
  Bottom Layer w0.203: v1@25.654,37.465 25.781,37.592 34.671,37.592 P5.3
UART3_RX: P6.2 U5.22 | length 19.8
  Top Layer w0.203: U5.22 21.054,30.412 21.748,29.718 24.13,29.718 24.638,29.21 24.638,28.225 28.098,24.765 34.671,24.765 P6.2
UART3_TX: P6.3 U5.21 | length 20
  Top Layer w0.203: U5.21 20.554,30.373 21.59,29.337 23.876,29.337 24.257,28.956 24.257,28.067 27.94,24.384 34.671,24.384 35.306,23.749 P6.3
UART_BLDC_RX: R27.1 U5.13 | length 23.9
  Top Layer w0.203: U5.13 16.554,32.429 17.018,32.893 17.018,33.528 18.542,35.052 v1(18.542,35.814)
  Bottom Layer w0.203: R27.1 6.612,45.212 9.494,45.212 10.541,44.165 10.541,40.894 12.954,38.481 14.986,38.481 17.653,35.814 v1(18.542,35.814)
UART_BLDC_TX: R25.1 U5.12 | length 23.2
  Top Layer w0.203: U5.12 16.3,32.81 16.51,33.02 16.51,33.782 17.907,35.179 v1(17.907,36.449)
  Bottom Layer w0.203: R25.1 6.231,45.593 9.652,45.593 10.922,44.323 10.922,41.148 13.208,38.862 15.494,38.862 v1(17.907,36.449)
VCC3.3V: C15.1 C23.2 C24.1 C25.1 C26.1 C27.1 C28.1 D2.1 DEBUG.4 P5.4 R26.2 R31.1 R32.2 R35.2 R42.1 U2.8 U4.1 U5.9 U5.24 U5.36 U5.48 U6.8 U6.13 U7.3 U7.7 U7.8 | length 148.3
  Top Layer w0.203: R35.2 8.789,31.149 8.789,33.027 9.162,33.401 v1(10.795,33.401) ; R32.2 R31.1 11.176,49.649 11.176,51.943 11.938,52.705 24.638,52.705 25.654,51.689 25.654,46.482 25.273,46.101 22.098,46.101 ; D2.1 14.478,40.767 15.635,39.61 U5.48 16.554,38.437 17.272,37.719 17.272,37.465 ; U5.9 16.403,34.31 17.272,35.179 17.272,37.465 ; U6.13 19.665,52.705 ; U6.8 21.549,48.145 22.098,47.596 22.098,46.101 ; v1(22.098,42.291) 22.098,44.45 ; C15.1 22.979,52.705 ; U5.36 20.657,38.31 v1(20.193,37.846) ; v1(24.638,44.45) 22.098,44.45 ; C26.1@25.267,31.51 U5.24 22.054,32.683 20.193,34.544 v1(20.193,37.846) ; 25.781,50.038 R26.2 C27.1 ; 17.272,37.465 18.542,37.465 18.923,37.846 v1(20.193,37.846) ; 22.098,44.45 22.098,46.101
  Top Layer w0.254: C25.1 35.298,32.377 P5.4
  Bottom Layer w0.203: v1(20.193,37.846) 21.133,38.786 U4.1 21.717,42.291 v1(22.098,42.291) ; U7.3 29.337,35.052 29.083,35.306 26.911,35.306 25.873,34.269 25.167,34.269 24.638,34.798 24.638,37.973 25.527,38.862 30.226,38.862 30.607,39.243 U7.7 U7.8 ; DEBUG.4@31.877,42.418 U7.8 ; C23.2 33.745,40.357 U7.8
  Bottom Layer w0.254: 24.765,36.825 32.898,36.825 P5.4
  Bottom Layer w0.279: C24.1 16.375,34.409 v1(17.145,35.179) ; v1(24.638,44.45) 30.353,44.45 DEBUG.4
  Bottom Layer w0.305: R42.1 8.89,40.005 10.795,38.1 v1(10.795,33.401) ; 10.795,33.806 14.891,33.806 C24.1
VCC5V: C5.1 C6.1 C10.1 L1.1 P1.2 P2.2 P6.4 R23.2 U1.8 | length 64.9
  Top Layer w0.254: v2(14.859,14.224) v2(14.859,21.463)
  Top Layer w0.305: v1(28.448,30.988) 29.083,31.623 U1.8
  Top Layer w0.508: C5.1@27.253,35.112 U1.8 ; C6.1 P1.2
  Bottom Layer w0.203: 34.29,12.319 34.671,12.319
  Bottom Layer w0.254: v2(14.859,21.463) 15.258,21.862 ccw(c13.462,23.658) 16.002,23.658 16.002,25.242 cw(c17.303,25.242) 16.383,26.162 16.457,26.236 cw(c16.891,25.803) 16.891,26.416 L1.1@19.588,26.416 ; L1.1@19.588,26.416 ccw(c19.588,27.99) L1.1 cw(c19.588,27.99) L1.1@19.588,26.416
  Bottom Layer w0.305: v1(28.448,30.988) 28.448,29.591 C10.1@30.226,27.813
  Bottom Layer w0.381: 34.671,12.827 P2.2 ; 34.671,21.209 P6.4
  Bottom Layer w0.508: 34.29,7.747 34.29,7.366 P1.2
  Bottom Layer w1: 25.781,25.527 33.528,25.527 34.29,24.765 34.29,12.319 34.29,7.747 ; 31.369,25.654 C10.1@31.369,27.813
VCC24V: C2.1 C3.1 C4.1 D6.1 J1.1 J2.1 Q4.0 R19.2 R20.2 R40.1 | length 60.8
  Top Layer w0.203: 21.336,9.398 v2(21.336,11.43)
  Top Layer w0.254: C2.1@23.876,5.08 23.876,6.985 24.511,7.62 v2(25.781,7.62)
  Top Layer w0.508: 7.366,21.209 v4(9.779,21.209)
  Top Layer w1.3: C3.1@16.891,5.588 16.891,6.604 19.685,9.398 21.336,9.398 22.098,9.398 24.384,7.112 C2.1
  Top Layer w1.5: C4.1@10.033,5.08 v3(11.811,5.08) v3(12.954,5.08) v3(14.097,5.08) C3.1@16.637,5.08
  Top Layer w3: J2.1 4.826,13.589 6.096,14.859 6.096,20.574 4.191,22.479 J1.1
  Bottom Layer w0.254: J1.1 4.318,24.638 4.318,28.448 D6.1@3.937,28.829
  Bottom Layer w3: J2.1 3.937,13.589 Q4.0@10.255,7.271
VCC24V_OUT: D1.1 J5.1 Q4.2 Q4.3 Q4.4 Q4.5 Q4.6 Q4.7 R1.1 R17.1 | length 9
  Bottom Layer w0.203: R17.1@18.288,11.938 18.288,8.89 18.796,8.382 Q4.2 ; Q4.6@21.308,2.949 D1.1
  other v3: 19.939,2.667 21.717,2.667 19.939,3.937 21.717,3.937 19.939,5.207 21.717,5.207 19.939,6.477 21.717,6.477
pads on no net: P4.2 U2.4 U2.6 U5.17 U6.2 U6.3 U6.4 U6.5 U6.6 U6.7 U6.12 U6.14 U6.15 U6.16 U6.17 U6.19 U6.21 U6.22 USB1.1 USB1.4 USB1.MH1 USB1.MH2

## Polygon pours and split planes (outlines as drawn)
GND on Top Layer "Bottom Layer-No Net" (solid, remove dead copper, pour order 5): 0,53.34 38.1,53.34 38.1,28.702 37.973,28.575 0,28.575
PGND on Top Layer "Bottom Layer-No Net" (solid, remove dead copper, pour order 6): -43.229,33.733 -5.256,33.733 -5.129,33.86 -5.129,5.92 -43.102,5.92 -43.229,6.047
GND on Bottom Layer "Bottom Layer-No Net" (solid, remove dead copper, pour order 4): 78.248,55.942 40.148,55.942 40.148,31.304 40.275,31.177 78.248,31.177

## Keep-outs
Keep-Out Layer:
  the board outline again, w0.254

## Other copper
Top Layer:
  rectangle net VCC24V_OUT: 0.508,0.381 19.558,3.175
  rectangle net VCC24V_OUT: 19.304,0.381 22.733,7.493
  rectangle net PGND: 29.464,25.4 30.48,26.289
Bottom Layer:
  rectangle net NetC8_1: 11.049,19.431 12.319,21.717
  rectangle net NetC8_1: 9.525,18.923 15.494,20.066
  rectangle net NetC7_2: 19.177,19.177 22.479,21.463
  rectangle net NetC7_2: 17.272,20.828 25.146,23.749
  rectangle net PGND: 10.16,23.876 13.97,28.448
  rectangle net PGND: 9.398,16.383 12.954,18.161
  rectangle net NetJ4_1: 5.08,21.209 8.128,28.448
  rectangle net VCC24V_OUT: 19.177,1.651 22.733,8.763

## Silkscreen, mask and mechanical layers (free items; w line width, h text height)
Top Overlay:
  text "TX2" at 3.175,45.339 h1.1
  text "RX2" at 3.175,42.799 h1.1
  text "PWM" at 3.302,29.464 h1.1
Bottom Overlay:
  text "C" at 26.797,43.688 h1.02
  text "D" at 29.337,43.688 h1.02
  text "G" at 24.257,43.561 h1.02
  text "V" at 31.877,43.561 h1.02
  text "RX1" at 35.052,37.084 h1.1
  text "TX1" at 35.179,35.433 h1.1
  text "3.3v" at 35.179,33.02 h1.1
  text "GND" at 34.671,29.718 h1.1 r90
  text "RX3" at 34.925,25.908 h1.1
  text "TX3" at 34.925,23.241 h1.1
  text "5v" at 34.925,20.701 h1.1
  text "5v" at 36.576,10.668 h1.1
  text "5v" at 34.671,5.08 h1.1
Top Solder:
  rectangle: 11.43,12.065 13.335,24.257
  rectangle: 3.556,1.016 22.225,2.413
  rectangle: 19.304,2.286 22.225,6.985
  rectangle: 10.922,24.13 13.97,27.686
Bottom Solder:
  rectangle: 5.842,25.019 7.874,28.321
  rectangle: 19.05,1.524 22.733,8.89
  lines w1.3: 2.159,17.907 5.461,17.907 6.477,18.923 6.477,27.686

## Text inside footprints (layer, text, board x,y; h text height)
U4: Bottom Overlay "mini NRF" at 21.107,49.378 h1.1